# EAGLE board usb (EAGLE 6.5.0)
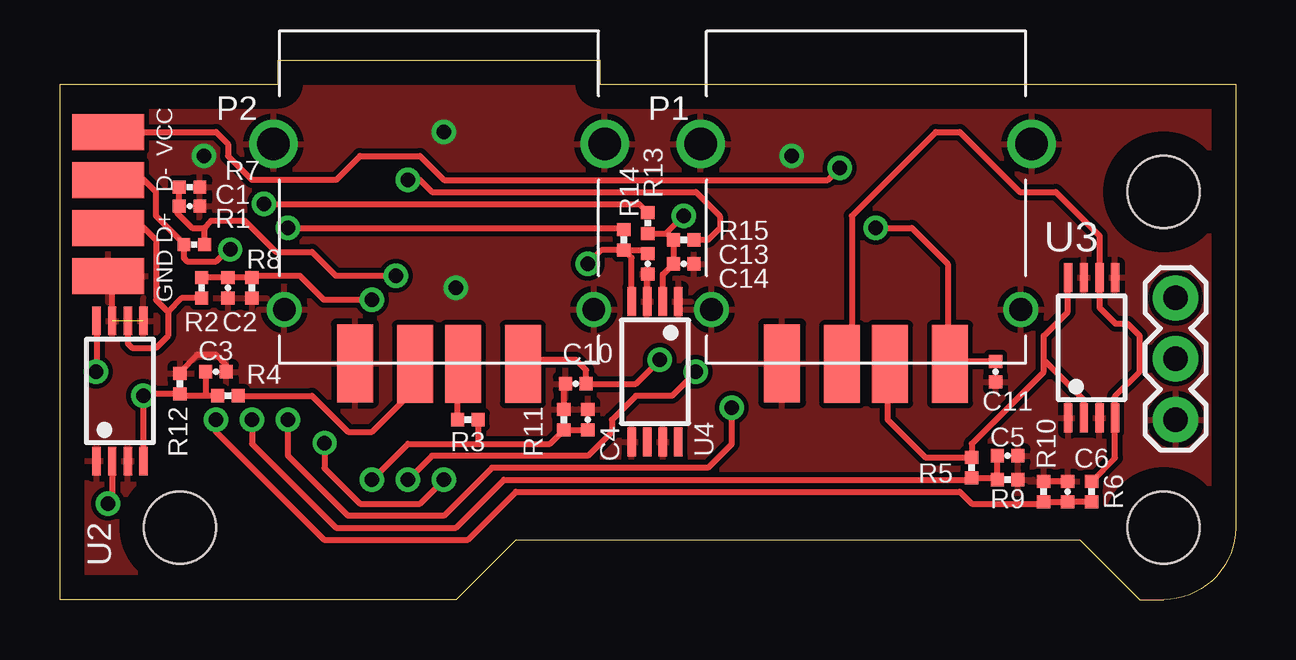
[diagram p0: board, top side]
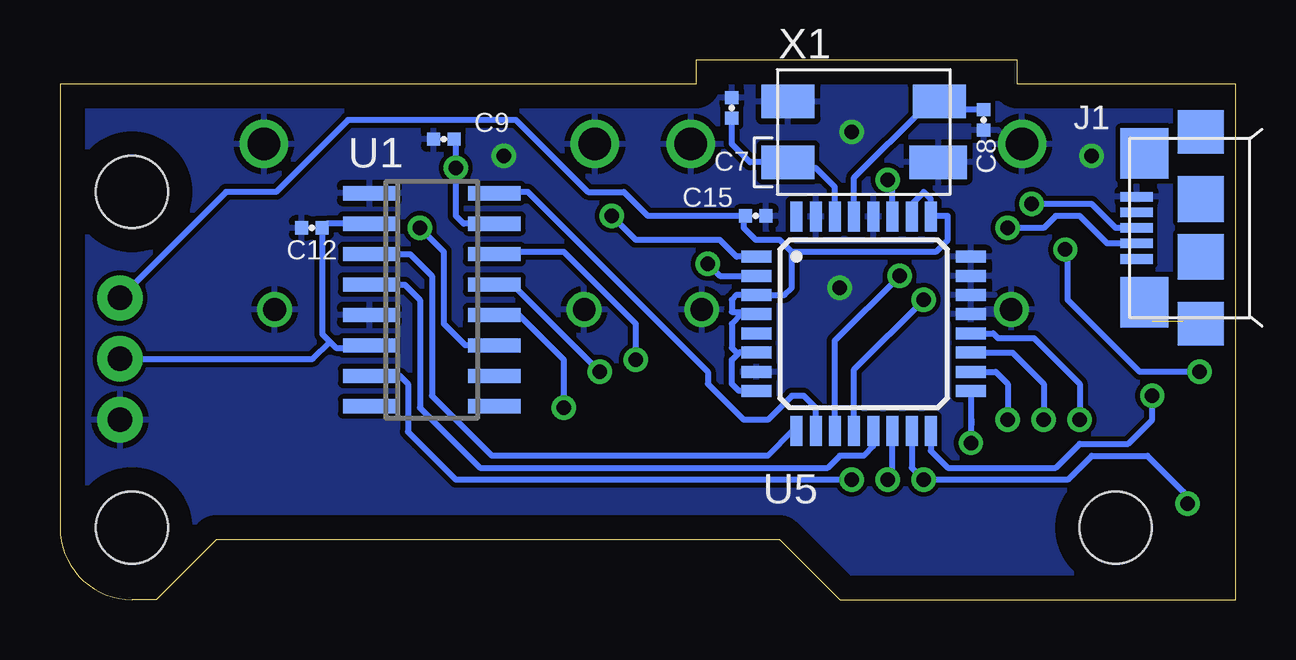
[diagram p1: board, bottom side, seen from below]

Size 49 x 22.5 mm. Coordinates in mm from the lower left corner, seen from the top.
Outline: 0,21.5 9.1,21.5 9.1,22.5 22.5,22.5 22.5,21.5 49,21.5 49,3 arc-90 46,0 45,0 42.5,2.5 19,2.5 16.5,0 0,0 0,21.5
Copper layers (1*16): Top 0.035mm / dielectric 1.5mm / Bottom 0.035mm
Design rules "default": minimum track width 10mil, minimum drill 24mil, track to track 8mil, track to pad 8mil, pad to pad 8mil, via to via 8mil, smd to smd 8mil, copper to edge 40mil, drill to drill 8mil, minimum pad ring 10mil, minimum via ring 8mil, stop-mask expansion 4mil, vias tented up to drill 0mil, thermal gap 10mil
Holes 3 mm at 5,3 46,3 46,17

## Footprints (pad centres in the part's own frame; a part is rotated, then mirrored left to right if it is on the bottom)
0402_CAP = smd 0.536 x 0.546: 1 -0.433,0; 2 0.433,0
USB_MICRO_B-HIROSE-ZX62-B-5PA(11) = smd 0.4 x 1.35: 1 -1.3,4.125; 2 -0.65,4.125; 3 0,4.125; 4 0.65,4.125; 5 1.3,4.125 | smd 2.1 x 2: P$1 3.1,3.8; P$2 -3.1,3.8 | smd 1.8 x 1.9: P$3 -4,1.45; P$6 4,1.45 | smd 1.9 x 1.9: P$4 -1.2,1.45; P$5 1.2,1.45
1X03 = drill 1.016 pad 1.88: 1 0,0; 2 2.54,0; 3 5.08,0
1932638-3_TE_AMP = smd 1.5 x 3.25: 1 -3.5,9.18; 2 -1,9.18; 3 1,9.18; 4 3.5,9.15 | drill 0.95: GND0 -6.45,6.91; GND1 6.45,6.91 | drill 1.35: GND2 -6.9,0; GND3 6.9,0
USB-A-TESTPOINT = smd 1.5 x 3: D+ 4,0; D- 2,0; GND 6,0; VCC 0,0
0402_RES = smd 0.536 x 0.546: 1 -0.433,0; 2 0.433,0
SO16 = smd 0.6 x 2.2: 1 -4.445,-2.6; 2 -3.175,-2.6; 3 -1.905,-2.6; 4 -0.635,-2.6; 5 0.635,-2.6; 6 1.905,-2.6; 7 3.175,-2.6; 8 4.445,-2.6; 9 4.445,2.6; 10 3.175,2.6; 11 1.905,2.6; 12 0.635,2.6; 13 -0.635,2.6; 14 -1.905,2.6; 15 -3.175,2.6; 16 -4.445,2.6
TSSOP8 = smd 1.2 x 0.35: 1 -2.925,0.975; 2 -2.925,0.325; 3 -2.925,-0.325; 4 -2.925,-0.975; 5 2.925,-0.975; 6 2.925,-0.325; 7 2.925,0.325; 8 2.925,0.975
VF_S-PQFP-G32 = smd 1.25 x 0.5: 1 -4.475,2.8; 2 -4.475,2; 3 -4.475,1.2; 4 -4.475,0.4; 5 -4.475,-0.4; 6 -4.475,-1.2; 7 -4.475,-2; 8 -4.475,-2.8; 17 4.475,-2.8; 18 4.475,-2; 19 4.475,-1.2; 20 4.475,-0.4; 21 4.475,0.4; 22 4.475,1.2; 23 4.475,2; 24 4.475,2.8 | smd 0.5 x 1.25: 9 -2.8,-4.475; 10 -2,-4.475; 11 -1.2,-4.475; 12 -0.4,-4.475; 13 0.4,-4.475; 14 1.2,-4.475; 15 2,-4.475; 16 2.8,-4.475; 25 2.8,4.475; 26 2,4.475; 27 1.2,4.475; 28 0.4,4.475; 29 -0.4,4.475; 30 -1.2,4.475; 31 -2,4.475; 32 -2.8,4.475
ABMM-6.000MHZ-B2-T = smd 2.21 x 1.397: 1 -3.15,-1.27; 2 -3.15,1.27; 3 3.15,1.27 | smd 2.388 x 1.397: 4 3.105,-1.27

## Placement (x,y rotation side)
C1  22p  [0402_CAP]  5.4,16.4 0 top
C2  22p  [0402_CAP]  7,13 270 top
C3  22p  [0402_CAP]  6.5,9.5 0 top
C4  22p  [0402_CAP]  22,7.5 90 top
C5  22p  [0402_CAP]  39.5,6 0 top
C6  22p  [0402_CAP]  42,4.5 90 top
C7  27p  [0402_CAP]  21,20.5 90 bottom
C8  27p  [0402_CAP]  10.5,20 270 bottom
C9  100u  [0402_CAP]  33,19.2 180 bottom
C10  100u  [0402_CAP]  21.5,9 180 top
C11  100u  [0402_CAP]  39,9.5 270 top
C12  0.1u  [0402_CAP]  38.5,15.5 180 bottom
C13  22p  [0402_CAP]  26,14 0 top
C14  22p  [0402_CAP]  24.5,14 270 top
C15  0.1u  [0402_CAP]  20,16 0 bottom
J1  MICRO_USB_B_HIROSE_ZX62-B-5PA(11)  [USB_MICRO_B-HIROSE-ZX62-B-5PA(11)]  0,15.5 90 bottom
JP1  [1X03]  46.5,7.5 90 top
P1  1932638-3_TE_AMP  [1932638-3_TE_AMP]  33.6,19 180 top
P2  1932638-3_TE_AMP  [1932638-3_TE_AMP]  15.8,19 180 top
P3  USB-A-FEMALETESTPOINT  [USB-A-TESTPOINT]  2,19.5 270 top
R1  27  [0402_RES]  5.6,14.8 180 top
R2  27  [0402_RES]  5.9,13 270 top
R3  27  [0402_RES]  17,7.5 180 top
R4  27  [0402_RES]  7,8.5 0 top
R5  27  [0402_RES]  38,5.5 90 top
R6  27  [0402_RES]  43,4.5 90 top
R7  15k  [0402_RES]  5.4,17.2 180 top
R8  15k  [0402_RES]  8,13 90 top
R9  15k  [0402_RES]  39.5,5 180 top
R10  15k  [0402_RES]  41,4.5 270 top
R11  15k  [0402_RES]  21,7.5 270 top
R12  15k  [0402_RES]  5,9 270 top
R13  27  [0402_RES]  24.5,15.7 270 top
R14  27  [0402_RES]  23.5,15 270 top
R15  1.5k  [0402_RES]  26,15 0 top
U1  TPS2043B  [SO16]  33.5,12.5 270 bottom
U2  SN75240  [TSSOP8]  2.5,8.7 90 top
U3  SN75240  [TSSOP8]  43,10.5 90 top
U4  SN75240  [TSSOP8]  24.8,9.5 270 top
U5  TUSB2036VF  [VF_S-PQFP-G32]  15.5,11.5 0 bottom
X1  ABMM-6.000MHZ-B2-T  [ABMM-6.000MHZ-B2-T]  15.5,19.5 0 bottom

## Library data of the parts
C1-C15 R1-R15 = passives
J1 = connector; DIGIKEY: H11634CT-ND; MOUSER: 798-ZX62-B-5PA11; NEWARK: 86P8793
JP1 = SparkFun-Connectors
P1-P3 U1-U5 X1 = BMO

## Nets
DM0: C14.1 R14.2 U4.4 U5.2
DP0: C13.1 R13.2 R15.1 U4.2 U5.1
DP0PUR: R15.2 U5.27
GND: C1.2 C2.2 C3.2 C4.2 C5.2 C6.2 C7.2 C8.2 C9.2 C10.2 C11.2 C12.2 C13.2 C14.2 C15.2 J1.5 JP1.1 P1.4 P1.GND0 P1.GND1 P1.GND2 P1.GND3 P2.4 P2.GND0 P2.GND1 P2.GND2 P2.GND3 P3.GND R7.1 R8.1 R9.1 R10.1 R11.1 R12.1 U1.1 U1.5 U2.1 U2.3 U2.5 U2.7 U3.1 U3.3 U3.5 U3.7 U4.1 U4.3 U4.5 U4.7 U5.7 U5.21 U5.22 U5.23 U5.24 U5.28 U5.31 X1.2 X1.4
N$1: C7.1 U5.30 X1.1
N$2: C8.1 U5.29 X1.3
N$3: C11.1 P1.1 U1.11
N$4: C10.1 P2.1 U1.14
N$5: C9.1 P3.VCC U1.15
N$7: P1.2 R5.2 U3.2 U3.8
N$8: P1.3 R6.2 U3.4 U3.6
N$9: P2.3 R4.2
N$10: P2.2 R3.2
N$11: P3.D+ R2.2 U2.6
N$12: P3.D- R1.2 U2.8
N$13: U1.3 U5.9
N$14: U1.4 U5.13
N$15: U1.7 U5.17
N$16: C1.1 R1.1 R7.2 U5.11
N$17: U1.16 U5.10
N$18: C2.1 R2.1 R8.2 U5.12
N$19: U1.13 U5.14
N$20: C5.1 R5.1 R9.2 U5.19
N$21: U1.12 U5.18
N$22: C6.1 R6.1 R10.2 U5.20
N$24: C4.1 R3.1 R11.2 U2.2 U5.15
N$25: C3.1 R4.1 R12.2 U2.4 U5.16
N$26: J1.2 R14.1
N$27: J1.3 R13.1
VCC3V3: C15.1 JP1.3 U5.3 U5.4 U5.6 U5.8 U5.25 U5.26
VCC5V: C12.1 JP1.2 U1.2 U1.6

## Tracks (layer width: path | path; a pad name or v marks a point on that pad's centre or on a via)
DM0  (via drill 0.6)
  Top 0.254: R14.2 24.37,14.57 C14.1 | U4.4 23.82,14.24 R14.2 | R14.2 22.57,14.57 v22,14
  Bottom 0.254: v22,14 21.5,13.5 U5.2
DP0  (via drill 0.6)
  Top 0.254: U4.2 25.12,13.56 C13.1 R15.1 25.3,15.27 | R13.2 25.3,15.27 | 25.3,15.27 25.3,15.3 v26,16
  Bottom 0.254: v26,16 25,15 21.5,15 20.8,14.3 U5.1
DP0PUR  (via drill 0.6)
  Top 0.254: R15.2 27,15 27.5,15.5 27.5,16 26.5,17 15.5,17 15,17.5 v14.5,17.5
  Bottom 0.254: U5.27 14.3,17.3 v14.5,17.5
GND  (via drill 0.6)  (1 unrouted)
  Top 0.254: 40,4.93 R9.1 | C6.2 R10.1 | R12.1 5,9.5 5.7,10.2 6.5,10.2 6.93,9.77 C3.2 | U2.7 2.17,13.32 P3.GND | U4.3 24.48,13.54 C14.2 | R11.1 21,8.93 C10.2
  other vias: 16,19.5 30.5,18.5 16.5,13 6,18.5
  pour Top: -2,21.5 -2,0 49,0 49,21.5 22.5,21.5 22.5,22.5 9,22.5 9,21.5
  pour Bottom: -2,21.5 9,21.5 9,22.5 22.5,22.5 22.5,21.5 49,21.5 49,0 -2,0
N$1
  Bottom 0.254: U5.30 16.7,17.2 17.5,18 18.42,18 X1.1 20.23,18.23 21,19 C7.1
N$2
  Bottom 0.254: C8.1 12.01,20.43 X1.3 12.62,20.5 13,20.5 15.9,17.6 U5.29
N$3  (via drill 0.6)
  Top 0.254: 36.93,9.75 P1.1 | C11.1 37.11,9.93 P1.1 | v34,15.5 35.5,15.5 37,14 37,9.92 P1.1
  Bottom 0.254: U1.11 32.09,10.59 33,11.5 33,14.5 v34,15.5
N$4  (via drill 0.6)
  Top 0.254: v25,10 24,9 C10.1 21.93,9.57 21.5,10 19.48,10 P2.1
  Bottom 0.254: U1.14 30.8,14.5 28,14.5 25,11.5 v25,10
N$5  (via drill 0.6)
  Top 0.254: v32.5,18 32,17.5 16,17.5 15,18.5 12.5,18.5 11.5,17.5 8,17.5 7,18.5 7,19 6.5,19.5 P3.VCC
  Bottom 0.254: U1.15 32.17,15.68 32.5,16 v32.5,18 32.5,19.13 C9.1
N$7
  Top 0.254: U3.8 42,13.4 42,12 41,11 41,10 | 37.93,6 R5.2 | R5.2 36.07,5.93 34.5,7.5 34.5,9.72 P1.2 | U3.2 42.67,8.32 41,10 | 41,10 41,9.5 38,6.5 R5.2
N$8
  Top 0.254: 42.93,4.93 42.93,5 R6.2 43.98,5.91 U3.4 | 44,7.55 U3.4 | U3.4 43.98,8.47 45,9.5 45,11 44.5,11.5 44,11.5 43.33,12.18 U3.6 43.33,15.18 41.5,17 40,17 37.5,19.5 36.5,19.5 33,16 33,10.22 P1.3
N$9
  Top 0.254: R4.2 10.5,8.5 12,7 13,7 14.5,8.5 14.5,9.52 P2.3
N$10
  Top 0.254: 16.5,9.52 P2.2 16.57,9.59 R3.2
N$11
  Top 0.254: U2.6 2.83,10.68 3,10.5 4,10.5 4.5,11 4.5,12 | P3.D+ 3.5,15.5 4,15 4,12.5 4.5,12 | R2.2 5.07,12.57 4.5,12
N$12  (via drill 0.6)
  Top 0.254: 1.93,17.57 P3.D- | 2.5,17 P3.D- | U2.8 1.52,9.53 v1.5,9.5 | P3.D- 3.5,17.5 4,17 4,16 5.17,14.83 R1.2 5.17,14.23 5.3,14.1 6.5,14.1 7,14.6 v7.1,14.6
  Bottom 0.254: v1.5,9.5 4,9.5 7,12.5 7,14.5 v7.1,14.6
N$13
  Bottom 0.254: U1.3 34.41,14.4 33.5,13.5 33.5,8.5 31,6 19.5,6 18.48,7.03 U5.9
N$14
  Bottom 0.254: U1.4 34.64,13.13 34,12.5 34,8 31.5,5.5 17,5.5 16.5,6 15.5,6 15.1,6.4 U5.13
N$15  (via drill 0.6)
  Top 0.254: v11.03,6.53 11.03,5.47 12.5,4 15,4 v16,5
  Bottom 0.254: U1.7 34.83,9.32 34.5,9 34.5,7 32.5,5 v16,5 | U5.17 v11.03,6.53 11,7.5
N$16  (via drill 0.6)
  Top 0.254: 4.9,17.27 R7.2 C1.1 4.9,16.33 4.9,16.1 5.5,15.5 6,15.5 | 6,15.5 6.3,15.8 7.7,15.8 9,14.5 10.5,14.5 11.5,13.5 v14,13.5 | R1.1 6.03,15.47 6,15.5
  Bottom 0.254: U5.11 16.7,10.8 v14,13.5
N$17
  Bottom 0.254: U5.10 17.5,8 18,8.5 18.5,8.5 19.5,7.5 20.5,7.5 22,9 22,9.5 29.5,17 30.84,17 U1.16
N$18  (via drill 0.6)
  Top 0.254: v13,12.5 11,12.5 10,13.5 8.07,13.5 R8.2 C2.1 R2.1
  Bottom 0.254: U5.12 15.9,9.6 v13,12.5
N$19  (via drill 0.6)
  Top 0.254: v14.5,5 15.5,6 22,6 23,7 23,7.5 24,8.5 25.5,8.5 v26.5,9.5
  Bottom 0.254: U1.13 30.14,13.13 v26.5,9.5 | v14.5,5 14.3,5.2 U5.14
N$20  (via drill 0.6)
  Top 0.254: C5.1 R9.2 39,5.07 R5.1 37.93,5 18.5,5 16.5,3 11.5,3 8,6.5 v8,7.5
  Bottom 0.254: U5.19 9.3,10.3 8,9 v8,7.5
N$21  (via drill 0.6)
  Top 0.254: v28,8 28,6.5 27,5.5 18,5.5 16,3.5 12,3.5 9.5,6 v9.5,7.5
  Bottom 0.254: U1.12 29.86,11.87 28,10 v28,8 | U5.18 10,9.5 9.5,9 v9.5,7.5
N$22  (via drill 0.6)
  Top 0.254: R6.1 C6.1 R10.2 40.93,4 38,4 37.5,4.5 19,4.5 17,2.5 11,2.5 6.5,7 v6.5,7.5
  Bottom 0.254: v6.5,7.5 6.5,9 8.4,10.9 9.9,10.9 10.1,11.1 U5.20
N$24  (via drill 0.6)
  Top 0.254: C4.1 R11.2 20.43,6.5 17.5,6.5 | U2.2 2.17,4.17 v2,4 | v13,5 14.5,6.5 17.5,6.5 | R3.1 17.43,6.57 17.5,6.5
  Bottom 0.254: v2,4 2.17,4.17 2.17,4.5 3.67,6 6,6 7,5 v13,5 13.5,5.5 U5.15
N$25  (via drill 0.6)
  Top 0.254: R4.1 6,8.5 | 6,8.5 5.07,8.5 R12.2 3.54,8.57 v3.48,8.5 U2.4 | C3.1 6.07,8.57 6,8.5
  Bottom 0.254: U5.16 12.7,6.2 12,5.5 7.5,5.5 6.5,6.5 4.47,6.5 3.48,7.5 v3.48,8.5
N$26  (via drill 0.6)
  Top 0.254: v9.5,15.5 23.43,15.5 R14.1
  Bottom 0.254: v9.5,15.5 8,15.5 7.5,16 6.5,16 5.35,14.85 J1.2
N$27  (via drill 0.6)
  Top 0.254: v8.5,16.5 24.13,16.5 R13.1
  Bottom 0.254: J1.3 5,15.5 6,16.5 v8.5,16.5
VCC3V3
  Bottom 0.254: JP1.3 42.08,17 40,17 37,20 30,20 27,17 25.5,17 24.5,16 C15.1 20.5,15.93 20.5,15.5 20,15 19,15 18.5,14.5 | U5.8 20.7,8.7 21,9 21,10 20.75,10.25 | U5.6 20.7,10.3 20.75,10.25 | 20.75,10.25 21,10.5 21,11.5 20.6,11.9 U5.4 20.07,12 21,12 21,12.5 20.8,12.7 U5.3 18.8,12.7 18.5,13 18.5,14.5 | U5.26 13.5,16.5 13,17 12.7,16.7 U5.25 12.68,16 12,16 12,15 12.5,14.5 18.5,14.5
VCC5V
  Bottom 0.254: U1.2 37.89,15.68 C12.1 38.07,11.07 37.75,10.75 | 37.75,10.75 37.5,10.5 36.2,10.5 U1.6 | JP1.2 38.46,10.04 37.75,10.75

## Text on the board
tValues: BMO USB / REV A / Neal Jackson